# EAGLE board ECE445-Transmitter-Schematic (EAGLE 7.5.0)
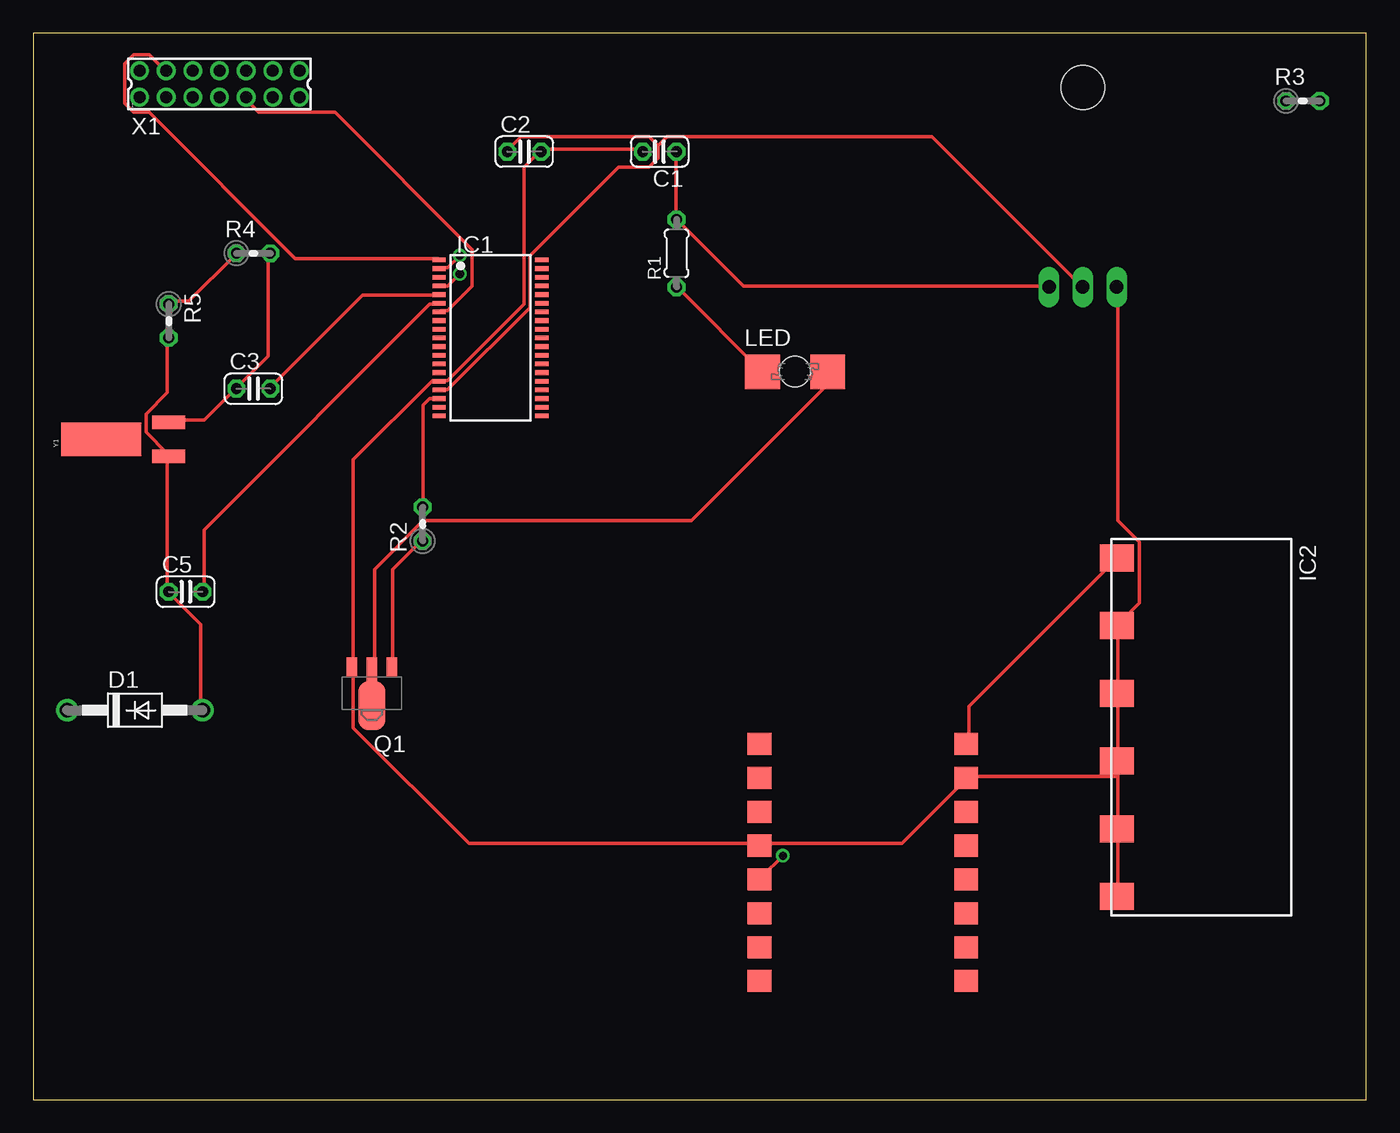
[diagram p0: board, top side]
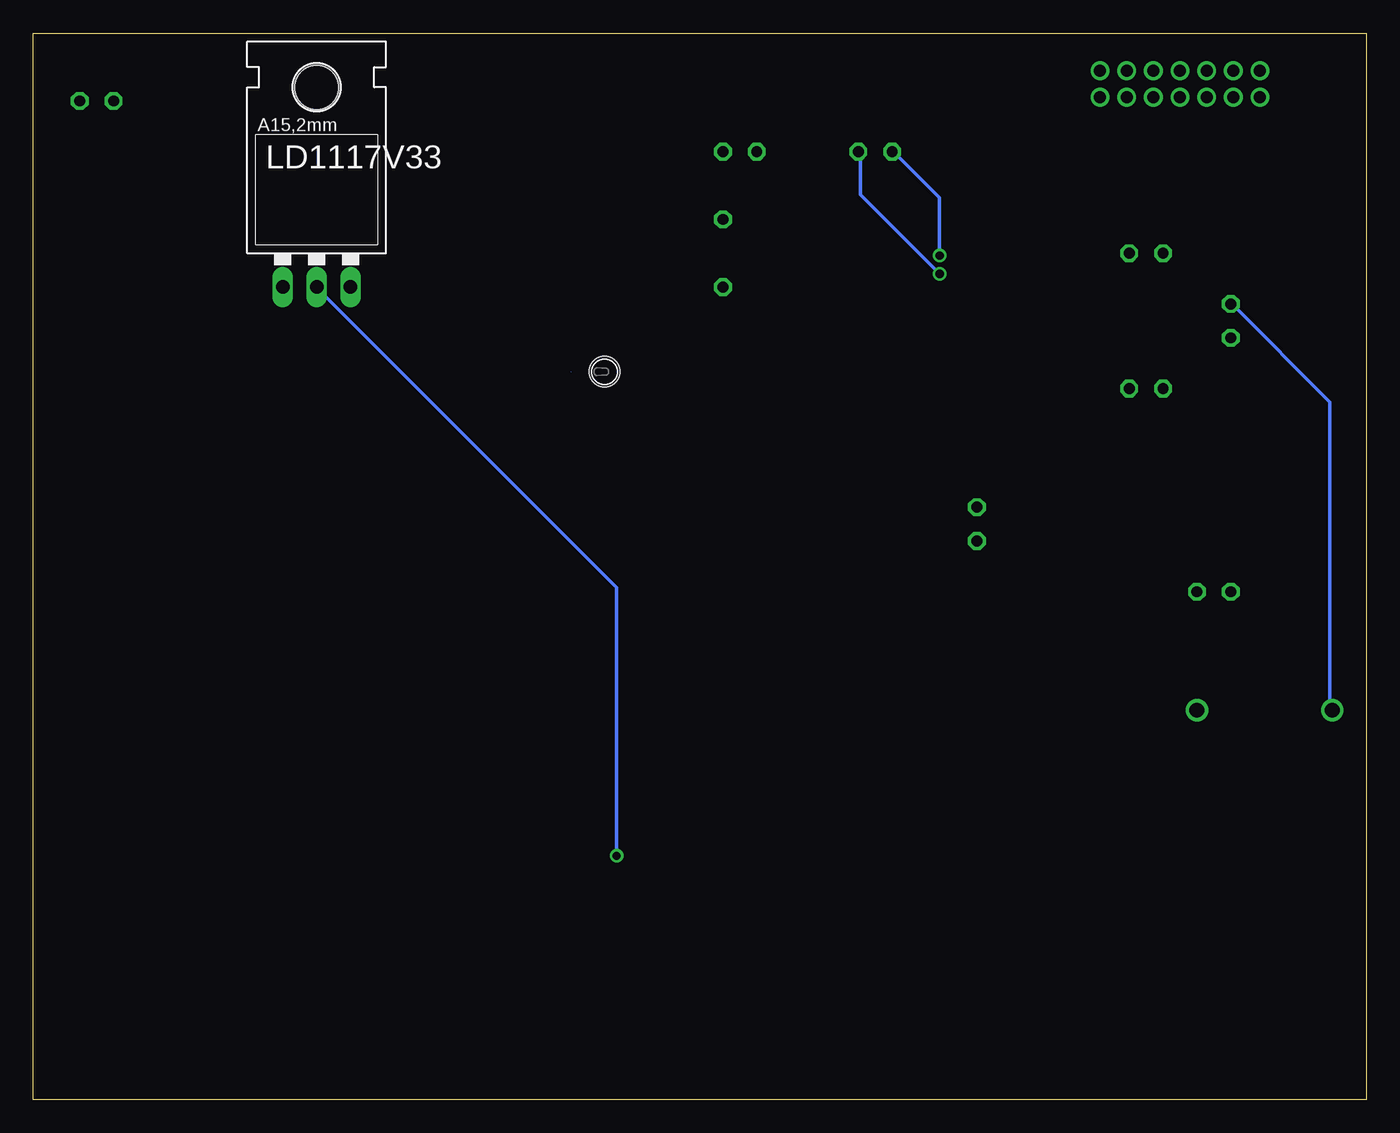
[diagram p1: board, bottom side, seen from below]

Size 100 x 80 mm. Coordinates in mm from the lower left corner, seen from the top.
Outline: 0,0 100,0 100,80 0,80 0,0
Copper layers (1*16): Top 0.035mm / dielectric 1.5mm / Bottom 0.035mm
Design rules "default": minimum track width 10mil, minimum drill 24mil, track to track 8mil, track to pad 8mil, pad to pad 8mil, via to via 8mil, smd to smd 8mil, copper to edge 40mil, drill to drill 8mil, minimum pad ring 10mil, minimum via ring 8mil, stop-mask expansion 4mil, vias tented up to drill 0mil, thermal gap 10mil

## Footprints (pad centres in the part's own frame; a part is rotated, then mirrored left to right if it is on the bottom)
C025-024X044 = drill 0.813 octagon: 1 -1.27,0; 2 1.27,0
DO41-10 = drill 1.118: A 5.08,0; C -5.08,0
TSSOP38_R-PDSO-G38-DA = smd 0.35 x 1: 1 -5.85,-3.85; 2 -5.2,-3.85; 3 -4.55,-3.85; 4 -3.9,-3.85; 5 -3.25,-3.85; 6 -2.6,-3.85; 7 -1.95,-3.85; 8 -1.3,-3.85; 9 -0.65,-3.85; 10 0,-3.85; 11 0.65,-3.85; 12 1.3,-3.85; 13 1.95,-3.85; 14 2.6,-3.85; 15 3.25,-3.85; 16 3.9,-3.85; 17 4.55,-3.85; 18 5.2,-3.85; 19 5.85,-3.85; 20 5.85,3.85; 21 5.2,3.85; 22 4.55,3.85; 23 3.9,3.85; 24 3.25,3.85; 25 2.6,3.85; 26 1.95,3.85; 27 1.3,3.85; 28 0.65,3.85; 29 0,3.85; 30 -0.65,3.85; 31 -1.3,3.85; 32 -1.95,3.85; 33 -2.6,3.85; 34 -3.25,3.85; 35 -3.9,3.85; 36 -4.55,3.85; 37 -5.2,3.85; 38 -5.85,3.85
ANT-XXX-SP = smd 2.032 x 2.54: 1 -12.7,0; 2 -7.62,0; 3 -2.54,0; 4 2.54,0; 5 7.62,0; 6 12.7,0
LD1117V33 = drill 1.016 long: GND -2.54,-8.89; IN 2.54,-8.89; OUT 0,-8.89 | hole 3.302: 0,6.096
P47F-BOTTOM = smd 2.6 x 2.6: A -2.45,0; C 2.45,0 | hole 2.3: 0,0
SOT89 = smd 0.8 x 1.4: 1 -1.499,-1.981; 3 1.499,-1.981 | smd 0.8 x 1.9: 2 0,-1.727 | smd 2.032 x 3.65: 2@1 0,0.94
0204/5 = drill 0.813 octagon: 1 -2.54,0; 2 2.54,0
0204V = drill 0.813 octagon: 1 -1.27,0; 2 1.27,0
LINX-RXM-315-LR = smd 1.778 x 1.651: 1 -7.747,8.89; 2 -7.747,6.35; 3 -7.747,3.81; 4 -7.747,1.27; 5 -7.747,-1.27; 6 -7.747,-3.81; 7 -7.747,-6.35; 8 -7.747,-8.89; 9 7.747,-8.89; 10 7.747,-6.35; 11 7.747,-3.81; 12 7.747,-1.27; 13 7.747,1.27; 14 7.747,3.81; 15 7.747,6.35; 16 7.747,8.89
87758-1416 = drill 0.9 pad 1.27: 1 -6,-1; 2 -6,1; 3 -4,-1; 4 -4,1; 5 -2,-1; 6 -2,1; 7 0,-1; 8 0,1; 9 2,-1; 10 2,1; 11 4,-1; 12 4,1; 13 6,-1; 14 6,1
CRYSTAL-32KHZ-SMD-MELF = smd 2.5 x 6: SHEILD 0,5.08 | smd 1 x 2.5: X1 -1.27,0; X2 1.27,0

## Placement (x,y rotation side)
C1  100 nF  [C025-024X044]  46.99,71.12 180 top
C2  100 uF  [C025-024X044]  36.83,71.12 0 top
C3  22 pF  [C025-024X044]  16.51,53.34 0 top
C5  22 pF  [C025-024X044]  11.43,38.1 0 top
D1  [DO41-10]  7.62,29.21 0 top
IC1  MSP430F2274IDA  [TSSOP38_R-PDSO-G38-DA]  34.29,57.15 270 top
IC2  ANT-XXX-SP  [ANT-XXX-SP]  81.28,27.94 270 top
LD1117V33  [LD1117V33]  78.74,69.85 0 bottom
LED  [P47F-BOTTOM]  57.15,54.61 0 top
Q1  [SOT89]  25.4,30.48 180 top
R1  1.9 kohm  [0204/5]  48.26,63.5 90 top
R2  10 kohm  [0204V]  29.21,43.18 90 top
R3  10 kohm  [0204V]  95.25,74.93 0 top
R4  33 kohm  [0204V]  16.51,63.5 0 top
R5  100 Mohm  [0204V]  10.16,58.42 270 top
U$1  LINX-RXM-315-LR  [LINX-RXM-315-LR]  62.23,17.78 0 top
X1  87758-1416  [87758-1416]  13.97,76.2 0 top
Y1  [CRYSTAL-32KHZ-SMD-MELF]  10.16,49.53 90 top

## Library data of the parts
C1-C3 C5 R1-R5 = rcl
D1 = diode
IC1 = texas; MPN: MSP430F2274IDA; OC_FARNELL: 1610179; OC_NEWARK: 28M6350
IC2 = linx; OC_FARNELL: unknown; OC_NEWARK: unknown
LD1117V33 = LD1117V33
LED = led
Q1 = semicon-smd-ipc
U$1 = LINX-RXM-315-LR
X1 = 14-pin-ribbon; MF: MOLEX; MPN: 87758-1416; OC_FARNELL: 7472358; OC_NEWARK: 59J1562
Y1 = SparkFun-FreqCtrl; PROD_ID: XTAL-07894

## Nets
+9V: C1.1 LD1117V33.IN R1.2
GND: C1.2 C2.2 IC1.4 IC1.15 IC2.2 IC2.3 IC2.4 IC2.5 IC2.6 LD1117V33.GND Q1.3 U$1.4 U$1.15
N$1: LED.C Q1.2
N$2: LED.A R1.1
N$3: IC1.17 R2.2
N$4: C5.2 IC1.6
N$5: C3.2 IC1.5
N$6: C3.1 R4.2 Y1.X2
N$7: IC1.36
N$8: D1.C R4.1 R5.1
N$9: IC2.1 U$1.16
N$10: IC1.35
N$11: C2.1 IC1.2 IC1.16 LD1117V33.OUT U$1.5
N$12: C5.1 D1.A R5.2 Y1.X1
N$13: IC1.1 X1.4
N$14: IC1.7 X1.9
N$15: Q1.1 R2.1

## Tracks (layer width: path | path; a pad name or v marks a point on that pad's centre or on a via)
+9V
  Top 0.254: C1.1 48.23,71.09 48.23,66.06 R1.2 53.26,61.04 76.12,61.04 LD1117V33.IN
GND  (via drill 0.61)
  Top 0.254: v32,61.95 31.09,61.04 30.63,61.04 IC1.4 | C1.2 45.72,71.32 38.18,71.32 C2.2 37.95,71.09 36.8,69.95 36.8,59.66 31.09,53.95 30.63,53.95 IC1.15 30.4,53.95 29.95,53.95 24,48.01 24,32.46 Q1.3 24,32.23 24,27.89 32.69,19.2 54.41,19.2 U$1.4 54.63,19.2 65.15,19.2 69.95,24 U$1.15 70.18,24.23 81.38,24.23 | IC2.6 81.38,15.32 81.38,20.12 IC2.5 81.38,20.34 81.38,24.23 | LD1117V33.GND 81.38,60.81 81.38,43.43 82.98,41.83 82.98,37.26 IC2.2 81.38,35.43 81.38,30.63 IC2.3 81.38,30.4 81.38,25.6 IC2.4 81.38,25.38 81.38,24.23
  Bottom 0.254: v32,61.95 37.95,67.89 37.95,71.09 C2.2
N$1
  Top 0.254: Q1.2 25.6,32.23 25.6,39.78 29.26,43.43 49.38,43.43 59.66,53.72 59.66,54.41 LED.C
N$2
  Top 0.254: LED.A 54.63,54.63 48.46,60.81 R1.1
N$3
  Top 0.254: IC1.17 30.4,52.58 29.72,52.58 29.26,52.12 29.26,44.58 R2.2
N$4
  Top 0.254: IC1.6 30.4,59.66 29.72,59.66 12.8,42.75 12.8,38.18 C5.2
N$5
  Top 0.254: IC1.5 30.4,60.35 24.69,60.35 17.83,53.49 C3.2
N$6
  Top 0.254: Y1.X2 10.29,50.98 12.8,50.98 15.09,53.26 C3.1 15.32,53.49 17.6,55.78 17.6,63.32 R4.2
N$8
  Top 0.254: R5.1 10.29,59.89 11.66,59.89 15.09,63.32 R4.1
  Bottom 0.254: D1.C 2.74,29.26 2.74,52.35 10.06,59.66 R5.1
N$9
  Top 0.254: U$1.16 70.18,26.75 70.18,29.49 81.15,40.46 IC2.1
N$11  (via drill 0.61)
  Top 0.254: 46.86,71.55 46.86,70.64 46.18,69.95 43.89,69.95 37.26,63.32 37.26,59.44 31.09,53.26 30.63,53.26 IC1.16 | 46.86,71.55 46.18,72.24 36.58,72.24 35.66,71.32 C2.1 | v32,63.32 31.09,62.41 30.63,62.41 IC1.2 | v56.24,18.29 54.63,16.69 U$1.5 | 46.86,71.55 47.55,72.24 67.44,72.24 78.64,61.04 LD1117V33.OUT
  Bottom 0.254: v32,63.32 32,67.67 35.43,71.09 C2.1 | v56.24,18.29 56.24,38.41 78.64,60.81 LD1117V33.OUT
N$12
  Top 0.254: R5.2 10.06,57.15 10.06,53.03 8.46,51.44 8.46,50.06 10.06,48.46 Y1.X1 10.06,48.23 10.06,38.18 C5.1 10.29,37.95 12.57,35.66 12.57,29.26 D1.A
N$13
  Top 0.254: IC1.1 30.4,63.09 19.66,63.09 8.69,74.07 7.54,74.07 6.86,74.75 6.86,77.72 7.54,78.41 8.69,78.41 9.83,77.27 X1.4
N$14
  Top 0.254: IC1.7 30.63,59.21 31.09,59.21 32.92,61.04 32.92,63.78 22.63,74.07 16.92,74.07 16,74.98 X1.9
N$15
  Top 0.254: Q1.1 26.98,32.46 26.98,39.78 29.03,41.83 R2.1